# Altium PCB YarnControl_Driver_v1.3.PcbDoc
Units mm, origin at the board's own origin, x right, y up, seen from the top; angles counter-clockwise.
Board outline 80 x 60 mm, 2 copper layers (Top Layer, Bottom Layer); 141 components, 102 nets, 471 pads, 205 vias.
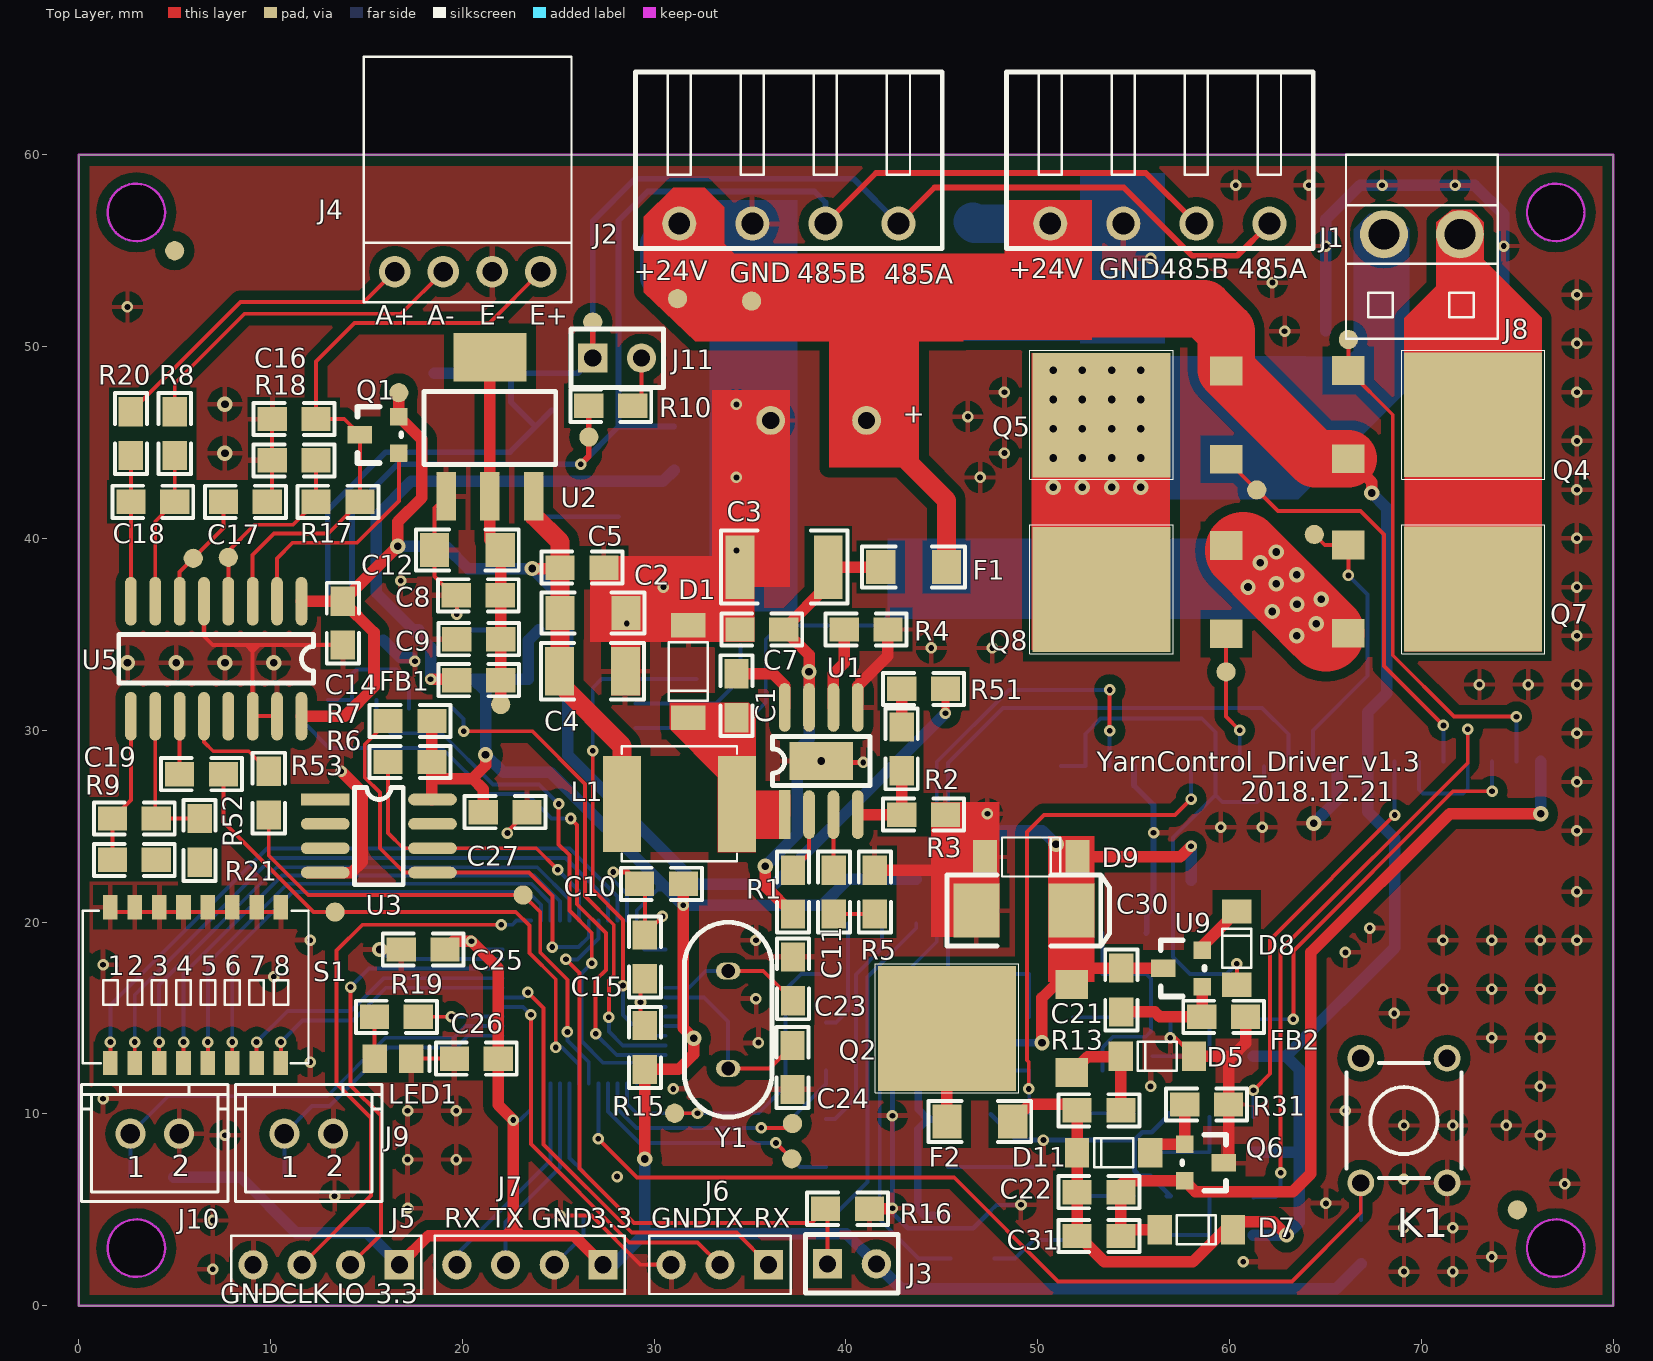
[diagram p0: Top Layer view]
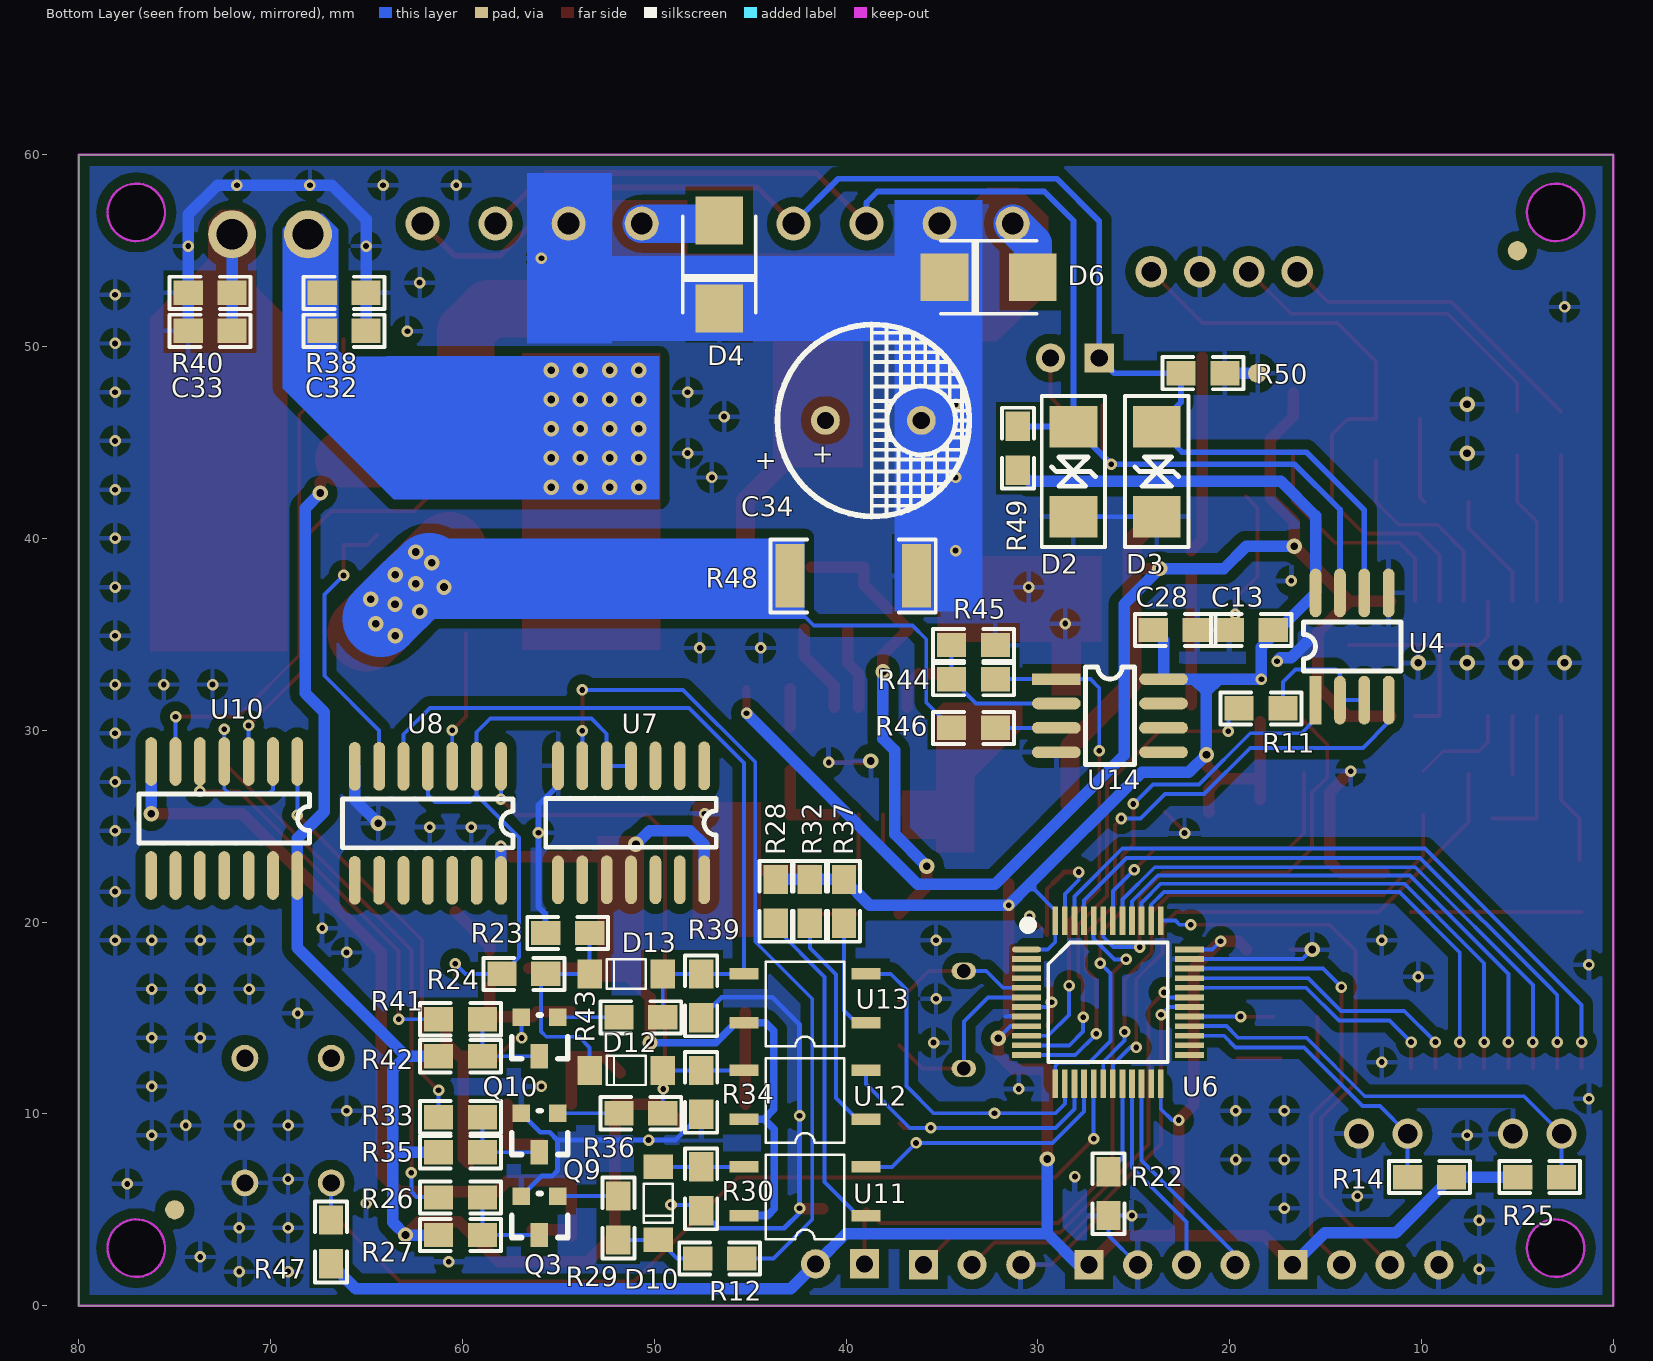
[diagram p1: Bottom Layer view, seen from below]
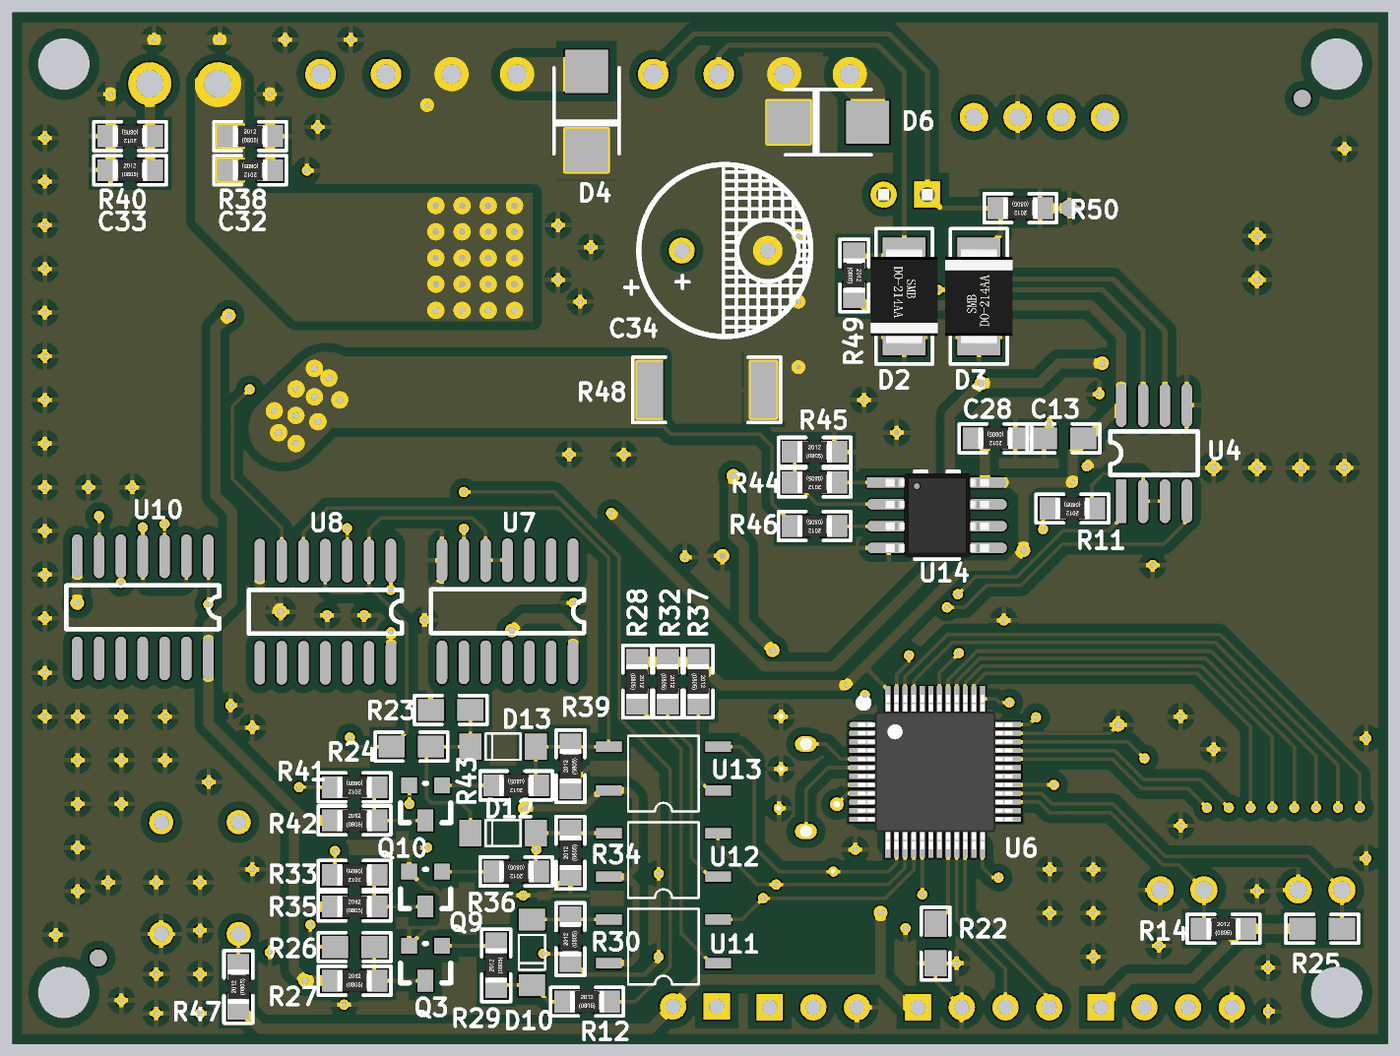
[diagram p2: 3D render of the assembled board from below, using the file's embedded part models]

## Layer stack, top to bottom
Top Layer: signal copper 0.0356
Dielectric: dielectric 0.32, FR-4, Dk 4.8
Bottom Layer: signal copper 0.0356

## Board outline
0,0 80,0 80,60 0,60
cut-out: 3,55.5 cw(c3,57) 1.5,57 cw(c3,57) 3,58.5 cw(c3,57) 4.5,57 cw(c3,57)
cut-out: 75.5,57 ccw(c77,57) 77,55.5 ccw(c77,57) 78.5,57 ccw(c77,57) 77,58.5 ccw(c77,57)
cut-out: 75.5,3 ccw(c77,3) 77,1.5 ccw(c77,3) 78.5,3 ccw(c77,3) 77,4.5 ccw(c77,3)
cut-out: 3,1.5 cw(c3,3) 1.5,3 cw(c3,3) 3,4.5 cw(c3,3) 4.5,3 cw(c3,3)

## Design rules (kind name [scope] priority, off if disabled: settings)
Clearance LQFP_48 [(HasFootprint('LQFP_48'))] p1: gap=0.178
Clearance poly [inpoly] p2: gap=0.508
Clearance [All] p3: gap=0.203
Height [All] p1: minheight=0 maxheight=50 prefheight=12.7
HoleSize [All] p1: absolutevalues=TRUE maxlimit=4 minlimit=0.025 maxpercent=80.000 minpercent=20.000
MinimumSolderMaskSliver [All] p1: minsoldermaskwidth=0
PolygonConnect [All] p1: connectstyle=Relief reliefconductorwidth=0.254 reliefentries=4 polygonreliefangle="90 Angle"
RoutingVias [All] p1: holewidth=0.711 width=1.27 viastyle="Through Hole" minholewidth=0.3 minwidth=0.6 maxholewidth=0.711 maxwidth=1.27
SilkToSilkClearance [All] p1: silktosilkclearance=0
SilkscreenOverComponentPads [All] p1: minsilkscreentomaskgap=0
SolderMaskExpansion [All] p1: expansion=0.102
Width [All] p1: maxlimit=5 minlimit=0.203 preferedwidth=0.203
23 further rules are at their usual default settings.

## Classes and differential pairs
component class YarnControl_motor_v1.3: C21 C22 C30 C31 C32 C33 C34 D4 D5 D6 D7 D8 D9 D10 D11 D12 D13 F2 FB2 J8 Q2 Q3 Q4 Q5 Q6 Q7 Q8 Q9 Q10 R12 R13 R23 R24 R26 R27 R28 R29 R30 R31 R32 R33 R34 R35 R36 R37 R38 R39 R40 R41 R42 R43 R44 R45 R46 R48 U7 U8 U9 U10 U11 U12 U13 U14
component class YarnControl_Driver_v1.3: C1 C2 C3 C4 C5 C7 C8 C9 C10 C11 C12 C13 C14 C15 C16 C17 C18 C19 C23 C24 C25 C26 C27 C28 D1 D2 D3 F1 FB1 J1 J2 J3 J4 J5 J6 J7 J9 J10 J11 K1 L1 LED1 Q1 R1 R2 R3 R4 R5 R6 R7 R8 R9 R10 R11 R14 R15 R16 R17 R18 R19 R20 R21 R22 R25 R47 R49 R50 R51 R52 R53 R? S1 U1 U2 U3 U4 U5 U6 Y1

## Components (designator, comment, footprint, x,y, rotation, side; value= is the part's Value field where it differs from the comment)
C1 "0.1uF" 0805#1 34.29,32.944 r270 top
C2 "22uF" 1206 28.524,36.119 r180 top
C3 "47uF" 1812 36.779,38.506 r180 top
C4 "47uF" 1210 28.499,33.071 r180 top
C5 "0.1uF" 0805#1 27.381,38.481 r180 top
C7 "0.1uF" 0805#1 36.754,35.255 r180 top
C8 "10uF" 0805#1 19.685,37.033 r0 top
C9 "0.1uF" 0805#1 19.71,34.747 r0 top
C10 "0.1uF" 0805#2 30.378,21.996 r180 top
C11 "150pF" 0805#1 39.37,22.708 r270 top
C12 "22uF" 1206 21.971,39.395 r180 top
C13 "0.1uF" 0805#1 20.015,35.23 r180 bottom
C14 "1uF" 0805#1 13.767,34.442 r90 top
C15 "0.1uF" 0805#1 29.515,19.329 r270 top
C16 "1uF" 0805#1 10.084,46.228 r0 top
C17 "1uF" 0805#1 7.544,41.91 r0 top
C18 "0.1uF" 0805#1 5.004,41.91 r180 top
C19 "0.1uF" 0805#1 1.753,25.4 r0 top
C21 "10uF" 0805#1 54.356,17.602 r270 top
C22 "10nF" 0805#1 52.045,5.918 r0 top
C23 "22pF" 0805#2 37.236,17.043 r270 top
C24 "22pF" 0805#2 37.211,12.421 r90 top
C25 "0.1uF" 0805#2 17.958,18.567 r0 top
C26 "0.1uF" 0805#2 20.726,12.878 r0 top
C27 "0.1uF" 0805#2 22.225,25.73 r180 top
C28 "0.1uF" 0805#2 22.835,35.23 r0 bottom
C30 "100uF" CA6032-C 49.276,20.599 r0 top
C31 "22uF" 0805#2 53.188,3.632 r180 top
C32 "10nF" 0805#2 66.167,50.825 r0 bottom
C33 "10nF" 0805#2 73.152,50.825 r180 bottom
C34 "1000uF/35V" CAP-5MM 41.072,46.152 r180 bottom
D1 "1N5819" Diode_TP2 31.775,35.484 r270 top
D2 "SMBJ6.5CA" SMBJ_DO-214 28.143,43.485 r270 bottom
D3 "SMBJ6.5CA" SMBJ_DO-214 23.8,43.485 r90 bottom
D4 "SMCJ24A" DO-214AA/SMB 46.609,54.28 r270 bottom
D5 "ZMM6V2" DIDODE_LL-34 56.236,13.005 r180 top
D6 "SMCJ24A" DO-214AA/SMB 32.563,53.619 r0 bottom
D7 "ZMM6V2" DIDODE_LL-34 58.268,3.962 r0 top
D8 "1N4148" DIDODE_LL-34 60.376,18.644 r90 top
D9 "SMAJ5.0A" Diode_TP2 47.244,23.393 r0 top
D10 "1N4148" DIDODE_LL-34 49.784,5.334 r270 bottom
D11 "ZMM6V2" DIDODE_LL-34 53.95,7.976 r180 top
D12 "1N4148" DIDODE_LL-34 51.46,12.268 r0 bottom
D13 "1N4148" DIDODE_LL-34 51.46,17.297 r0 bottom
F1 "FUSE" 1206 45.237,38.506 r180 top
F2 "FUSE" 1206 45.263,9.601 r0 top
FB1 "FERRITE" 0805#1 21.996,32.614 r180 top
FB2 "FERRITE" 0805#2 59.69,15.062 r0 top
J1 "SH-4" J381-4-90 62.078,56.413 r0 top
J2 "SH-4" J381-4-90 42.735,56.413 r0 top
J3 "Jumper" J254-2 39.04,2.184 r0 top
J4 "SH-4" KF2510-4 24.088,53.913 r0 top
J5 "SH-4" J254-4 16.713,2.134 r180 top
J6 "SH-3" J2.54-3 33.426,2.134 r180 top
J7 "SH-4" J254-4 27.33,2.134 r180 top
J8 "SH-2" CH3.96-2P 70.028,55.855 r0 top
J9 "SWITCH1" XH2.54-2T 10.719,8.966 r0 top
J10 "SWITCH2" XH2.54-2T 2.692,8.966 r0 top
J11 "Jumper" J254-2 26.797,49.403 r0 top
K1 "BUTTON_4" Button1 69.088,9.652 r90 top
L1 "4.7uH" Inductance6*6 31.318,26.162 r180 top
LED1 "GREEN" LED 16.383,12.878 r0 top
Q1 "S8550" 901X_SOT-23 14.656,45.415 r90 top
Q2 "2SD1760" TO-252-2L 48.514,14.453 r90 top
Q3 "MMBT3904" SOT-23 55.982,3.683 r0 bottom
Q4 "NCE40P70K" TO-252 72.695,46.457 r270 top
Q5 "NCE40P70K" TO-252 53.315,46.431 r90 top
Q6 "MMBT2907A" 901X_SOT-23 59.69,7.442 r270 top
Q7 "NCE6075" TO-252 72.695,37.363 r270 top
Q8 "NCE6075" TO-252 53.315,37.338 r90 top
Q9 "MMBT3904" SOT-23 55.982,8.001 r0 bottom
Q10 "MMBT3904" SOT-23 55.982,13.005 r0 bottom
R1 "100K" 0805#1 37.236,22.708 r270 top
R2 "200K" 0805#1 42.901,30.175 r270 top
R3 "40.2K" 0805#1 45.187,25.603 r180 top
R4 "100K" 0805#1 42.189,35.255 r180 top
R5 "100K" 0805#1 41.504,22.708 r270 top
R6 "10K" 0805#1 16.129,28.346 r0 top
R7 "10K" 0805#1 16.129,30.48 r0 top
R8 "1K" 0805#2 5.004,45.466 r90 top
R9 "1K" 0805#2 2.896,23.241 r0 top
R10 "120R" 0805#1 26.594,46.914 r0 top
R11 "1K" 0805#2 18.364,31.14 r0 bottom
R12 "4.7K" 0805#2 46.584,2.464 r180 bottom
R13 "5.6K" 0805#2 53.188,10.185 r0 top
R14 "10K" 0805#2 9.576,6.706 r180 bottom
R15 "10K" 0805#1 29.515,14.605 r270 top
R16 "10K" 0805#1 38.938,5.055 r0 top
R17 "20K" 0805#1 12.37,41.91 r0 top
R18 "8.2K" 0805#1 12.37,44.069 r180 top
R19 "1K" 0805#1 15.418,15.062 r0 top
R20 "1K" 0805#1 2.718,44.323 r90 top
R21 "1K" 0805#1 6.299,25.4 r270 top
R22 "10K" 0805#1 26.314,4.699 r90 bottom
R23 "10K" 0805#1 55.651,19.431 r180 bottom
R24 "10K" 0805#1 55.651,17.297 r0 bottom
R25 "10K" 0805#1 4.978,6.706 r180 bottom
R26 "10K" 0805#1 58.953,5.639 r0 bottom
R27 "10K" 0805#2 60.096,3.683 r180 bottom
R28 "510R" 0805#2 43.663,21.082 r270 bottom
R29 "10K" 0805#2 51.867,4.572 r90 bottom
R30 "510R" 0805#2 47.549,6.096 r90 bottom
R31 "5.6K" 0805#2 58.801,10.49 r180 top
R32 "510R" 0805#2 41.885,21.082 r270 bottom
R33 "10K" 0805#2 60.096,9.83 r0 bottom
R34 "4.7K" 0805#2 47.549,11.125 r90 bottom
R35 "10K" 0805#2 60.096,8.001 r180 bottom
R36 "10K" 0805#2 50.698,10.033 r0 bottom
R37 "510R" 0805#2 40.107,21.082 r270 bottom
R38 "1M" 0805#2 66.167,52.807 r180 bottom
R39 "4.7K" 0805#2 47.549,16.154 r90 bottom
R40 "1M" 0805#2 73.152,52.807 r0 bottom
R41 "10K" 0805#2 60.096,14.935 r0 bottom
R42 "10K" 0805#2 60.096,13.005 r180 bottom
R43 "10K" 0805#2 50.698,15.037 r0 bottom
R44 "10K" 0805#2 33.35,32.664 r0 bottom
R45 "1K" 0805#2 33.35,34.442 r180 bottom
R46 "1K" 0805#2 33.35,30.124 r0 bottom
R47 "10K" 0805#2 66.853,3.327 r90 bottom
R48 "R100" 2512 39.624,38.049 r0 bottom
R49 "360R" 0805#2 31.039,44.704 r270 bottom
R50 "360R" 0805#2 21.387,48.616 r0 bottom
R51 "10K" 0805#2 44.044,32.156 r180 top
R52 "1K" 0805#1 7.544,27.711 r180 top
R53 "1K" 0805#1 9.906,25.578 r90 top
S1 "SW-CH8" SWITCH_8 6.096,16.713 r0 top
U1 "MP1584" MP1584 38.71,28.397 r90 top
U2 "AMS1117" TO-223 21.438,45.822 r0 top
U3 "SMEC98SP" SO-8#1 15.646,24.486 r0 top
U4 "SP3485" SO-8#1 13.614,34.366 r90 bottom
U5 "HX711" SO-16 11.608,36.728 r270 top
U6 "STM32F103C8T6" LQFP_48 26.34,15.824 r180 bottom
U7 "74VHC00" SO-14 47.396,28.143 r270 bottom
U8 "74VHC08" SO-14 57.988,28.118 r270 bottom
U9 "MAX809" SOT-23 56.54,17.602 r90 top
U10 "74VHC00" SO-14 68.605,28.372 r270 bottom
U11 "EL357N" EL357N 42.139,5.969 r0 bottom
U12 "EL357N" EL357N 42.139,10.998 r0 bottom
U13 "EL357N" EL357N 42.139,16.027 r0 bottom
U14 "LM358" SO-8#2 29.032,32.664 r180 bottom
Y1 "8M" XTAL 33.858,12.37 r90 top

## Footprints (in the part's own frame and the unit in brackets; to place one, negate y for a bottom-side part, rotate by r counter-clockwise, add the part's x,y. Pads: shape width x height; smd on the part's side, far side on the other; paste and mask are expansions set on the pad)
0805#1 [mil]
  rect 60x50 smd: 1(0,0) 2(90,0)
  silkscreen extent -38,-33 128,33
0805#2 [mil]
  rect 60x50 smd: 1(-45,0) 2(45,0)
  silkscreen extent -83,-33 83,33, body extent -39,-25 39,24, height 18
901X_SOT-23 [mil]
  rect 36x50 smd: 1(0,0)
  rect 36x36 smd: 2(-38,-80) 3(37,-80)
  silkscreen extent -58,-85 57,5
1206 [mil]
  rect 60x70 smd: 1(0,0) 2(135,0)
  silkscreen extent -38,-42 173,42
1210 [mil]
  rect 60x100 smd: 1(0,0) 2(135,0)
  silkscreen extent -38,-58 173,58
1812 [mm]
  rect 1.5x3.3 smd: 1(-2.3,0) 2(2.3,0)
  silkscreen extent -3.3,-1.91 3.3,1.91
2512 [mm]
  rect 1.5x3.3 smd: 1(-3.3,0) 2(3.3,0)
  silkscreen extent -4.3,-1.91 4.3,1.91
Button1 [mm]
  round 1.4 hole 0.9: 1(-3.25,2.25) 2(3.25,2.25) 3(-3.25,-2.25) 4(3.25,-2.25)
  silkscreen extent -3,-3 3,3, body extent -3.94,-3 4.03,3, height 4.9
CA6032-C [mm]
  rect 2.4x2.8 smd: 1(2.48,0) 2(-2.48,0)
  silkscreen extent -4.01,-1.85 4.47,1.85, body extent -3.05,-1.68 3.05,1.67, height 2.7
CAP-5MM [mm]
  round 1.5 hole 0.9: 1(0,0) 2(5,0)
  silkscreen extent -2.5,-5 7.5,5
CH3.96-2P [mm]
  round 2.5 hole 1.6: 1(-1.98,0) 2(1.98,0)
  silkscreen extent -3.96,-5.45 3.96,4.15
DIDODE_LL-34 [mil]
  rect 50x60 smd: 1(-75,0) 2(75,0)
  silkscreen extent -40,-30 40,30
Diode_TP2 [mil]
  rect 50x70 smd: 1(0,0) 2(190,0)
  silkscreen extent 35,-40 155,40
DO-214AA/SMB [mm]
  rect 2.5x2.5 smd: 1(-2.3,0) 2(2.3,0)
  silkscreen extent -2.5,-1.9 2.5,1.9
EL357N [mm]
  rect 1.5x0.6 smd: 1(-3.175,1.27) 2(-3.175,-1.27) 3(3.175,-1.27) 4(3.175,1.27)
  silkscreen extent -2.05,-1.9 2.05,2.5
Inductance6*6 [mm]
  rect 2x5 smd: 1(-3,0) 2(3,0)
  silkscreen extent -3,-3 3,3
J2.54-3 [mil]
  rect 60x60 hole 35: 1(-100,0)
  round 60 hole 35: 2(0,0) 3(100,0)
  silkscreen extent -145,-60 145,60
J254-2 [mil]
  rect 60x60 hole 35: 1(0,0)
  round 60 hole 35: 2(100,0)
  silkscreen extent -45,-60 145,60
J254-4 [mil]
  rect 60x60 hole 35: 1(0,0)
  round 60 hole 35: 2(100,0) 3(200,0) 4(300,0)
  silkscreen extent -45,-60 345,60
J381-4-90 [mil]
  round 70 hole 45: 1(0,0) 2(-150,0) 3(-300,0) 4(-450,0)
  silkscreen extent -540,-51 90,311
KF2510-4 [mil]
  round 65 hole 40: 1(0,0) 2(-100,0) 3(-200,0) 4(-300,0)
  silkscreen extent -363,-63 63,441
LED [mm]
  rect 1.3x1.5 smd: 1(-0.95,0) 2(0.95,0)
  silkscreen extent 1.9,-0.65 1.9,0.65
LQFP_48 [mm]
  oval 1.5x0.3 smd: 1(-4.25,2.75)
  rect 1.5x0.3 smd: 2(-4.25,2.25) 3(-4.25,1.75) 4(-4.25,1.25) 5(-4.25,0.75) 6(-4.25,0.25) 7(-4.25,-0.25) 8(-4.25,-0.75) 9(-4.25,-1.25) 10(-4.25,-1.75) 11(-4.25,-2.25) 12(-4.25,-2.75) 25(4.25,-2.75) 26(4.25,-2.25) 27(4.25,-1.75) 28(4.25,-1.25) 29(4.25,-0.75) 30(4.25,-0.25) 31(4.25,0.25) 32(4.25,0.75) 33(4.25,1.25) 34(4.25,1.75) 35(4.25,2.25) 36(4.25,2.75)
  rect 0.3x1.5 smd: 13(-2.75,-4.25) 14(-2.25,-4.25) 15(-1.75,-4.25) 16(-1.25,-4.25) 17(-0.75,-4.25) 18(-0.25,-4.25) 19(0.25,-4.25) 20(0.75,-4.25) 21(1.25,-4.25) 22(1.75,-4.25) 23(2.25,-4.25) 24(2.75,-4.25) 37(2.75,4.25) 38(2.25,4.25) 39(1.75,4.25) 40(1.25,4.25) 41(0.75,4.25) 42(0.25,4.25) 43(-0.25,4.25) 44(-0.75,4.25) 45(-1.25,4.25) 46(-1.75,4.25) 47(-2.25,4.25) 48(-2.75,4.25)
  silkscreen extent -4.33,-3.11 3.11,4.18, body extent -4.5,-4.5 4.5,4.5, height 1.6
MP1584 [mil]
  rect 78.74x129.92 smd: 0(0,0)
  rect 100x24 smd: 1(-110,75)
  oval 100x24 smd: 2(-110,25) 3(-110,-25) 4(-110,-75) 5(110,-75) 6(110,-25) 7(110,25) 8(110,75)
  silkscreen extent -50,-100 50,100
SMBJ_DO-214 [mm]
  rect 2.16x2.5 smd: 1(-2.35,0) 2(2.35,0)
  silkscreen extent -3.94,-1.65 3.94,1.65, body extent -2.8,-1.95 2.8,1.95, height 2.5
SO-8#1 [mil]
  rect 100x24 smd: 1(-110,75)
  oval 100x24 smd: 2(-110,25) 3(-110,-25) 4(-110,-75) 5(110,-75) 6(110,-25) 7(110,25) 8(110,75)
  silkscreen extent -50,-100 50,100
SO-8#2 [mil]
  rect 100x24 smd: 1(0,0)
  oval 100x24 smd: 2(0,-50) 3(0,-100) 4(0,-150) 5(220,-150) 6(220,-100) 7(220,-50) 8(220,0)
  silkscreen extent 60,-175 160,25, body extent -7,-172 229,21, height 67
SO-14 [mil]
  oval 100x24 smd: 1(0,0) 2(0,-50) 3(0,-100) 4(0,-150) 5(0,-200) 6(0,-250) 7(0,-300) 8(234,-300) 9(234,-250) 10(234,-200) 11(234,-150) 12(234,-100) 13(234,-50) 14(234,0)
  silkscreen extent 67,-325 167,25
SO-16 [mil]
  oval 100x24 smd: 1(0,0) 2(0,-50) 3(0,-100) 4(0,-150) 5(0,-200) 6(0,-250) 7(0,-300) 8(0,-350) 9(236,-350) 10(236,-300) 11(236,-250) 12(236,-200) 13(236,-150) 14(236,-100) 15(236,-50) 16(236,0)
  silkscreen extent 68,-375 168,25
SOT-23 [mil]
  rect 36x36 smd: 1(-38,-80) 2(37,-80)
  rect 36x50 smd: 3(0,0)
  silkscreen extent -58,-85 57,5
SWITCH_8 [mm]
  rect 0.76x1.27 smd: 1(-4.445,-4.06) 2(-3.175,-4.06) 3(-1.905,-4.06) 4(-0.635,-4.06) 5(0.635,-4.06) 6(1.905,-4.06) 7(3.175,-4.06) 8(4.445,-4.06) 9(4.445,4.06) 10(3.175,4.06) 11(1.905,4.06) 12(0.635,4.06) 13(-0.635,4.06) 14(-1.905,4.06) 15(-3.175,4.06) 16(-4.445,4.06)
  silkscreen extent -5.88,-4.06 5.88,3.88
TO-223 [mil]
  rect 150x100 smd: 0(0,142.5)
  rect 40x100 smd: 1(-90,-142.5) 2(0,-142.5) 3(90,-142.5)
  silkscreen extent -135,-78 135,72
TO-252 [mm]
  rect 6.5x7.2 smd: 1(0,0)
  rect 1.5x1.7 smd: 2(-2.3,-6.5) 3(2.3,-6.5)
  silkscreen extent -3.35,-3.73 3.38,3.73
TO-252-2L [mm]
  rect 1.5x1.7 smd: 1(-2.3,-3.25) 3(2.3,-3.25)
  rect 6.5x7.2 smd: 2(0,3.25)
  silkscreen extent -3.35,-0.48 3.38,6.98
XH2.54-2T [mil]
  round 62 hole 40: 1(0,0) 2(100,0)
  silkscreen extent -100,-139 200,101
XTAL [mil]
  oval 35x50 hole 28: 1(0,0) 2(200,0)
  silkscreen extent -100,-90 300,90, body extent -121,-93 319,91, height 143

## Part data
C1 C2 C3 C7 C11 C12 C14 C16 C17 C18 C19 C21 C22 C23 C24 C31 C32 C33: library part CAP, "电容"
C4 C5 C8 C9: library part Cap0805
C10 C13 C15 C25 C26 C27 C28: library part Cap, "Capacitor"
C30: library part CapAEC*4
C34: library part "Cap Pol1", "Polarized Capacitor (Radial)"
D1: library part Diode, "二极管"
D2 D3 D4 D6 D9: library part TVS
D5 D7 D11: library part "D Zener", "Zener Diode"
D8 D10 D12 D13: library part Diode, "Default Diode"
F1 F2: "保险丝"
J9 J10: library part SH-2
L1: library part Inductor, "电感"
LED1: library part LED2, "Typical RED, GREEN, YELLOW, AMBER GaAs LED"
Q1 Q6: library part PNP
Q3 Q9 Q10: library part S8050
Q4 Q5: library part MOSFET-P, "P-Channel MOSFET"
Q7 Q8: library part MOSFET-N, "N-Channel MOSFET"
R1 R2 R3 R4 R5 R8 R9 R12 R13 R16 R17 R18 R19 R20 R21 R23 R24 R26 R27 R28 R29 R30 R31 R32 R33 R34 R35 R36 R37 R38 R39 R40 R41 R42 R43 R44 R45 R46 R48 R51 R52 R53: library part RES, "电阻"
R6 R7 R10 R11 R14 R15 R22 R25 R47 R49 R50: library part Res2, "Resistor"
S1: "拨码开关CH8"
U4: "485"
U8: library part 74HC08
U11 U12 U13: library part TLP521
Y1: library part XTAL, "Crystal Oscillator"

## Free pads (board coordinates)
  round 1 smd: 0(5,55) 0(23.165,21.412) 0(75,5) 1(13.36,20.523) 2(16.688,47.6) 3(21.996,31.344) 5(31.217,52.502) 6(35.077,52.375) 7(37.172,7.659) 8(37.211,9.5) 9(31.064,10.033) 10(66.192,50.368) 11(61.415,42.531) 12(59.815,33.045) 13(64.414,40.208) 14(26.594,45.288) 15(26.797,51.283) 16(7.798,39.014) 17(5.969,38.964)
  round 1 smd far side: 0(5,55) 0(75,5) 4(18.542,48.616)

## Via types
v1: diameter 0.6, hole 0.3, Top Layer to Bottom Layer, 154 vias
v2: diameter 0.8, hole 0.4, Top Layer to Bottom Layer, 51 vias

## Nets (pads, with @x,y where several pads share a name; then routed paths per layer and width w, separated by ;. In a path a pad name is that pad's centre, name@x,y a point inside that pad or via, vN(x,y) a via of type N, cw(c..) or ccw(c..) an arc to the next point about the centre after c; other vN are vias at no path point)
485_DE: R11.2 U6.11 | length 25.8
  Top Layer w0.203: v1(20.066,29.947) 23.647,29.947 26.391,27.203 26.391,21.361 27.889,19.863 27.889,17.221 27.635,16.967 v1(27.635,15.037)
  Bottom Layer w0.203: R11.2 20.066,30.582 v1(20.066,29.947) ; v1(27.635,15.037) 27.635,14.3 28.361,13.574 U6.11
485_RX: U4.1 U6.13 | length 30
  Top Layer w0.203: v1(25.019,26.162) 25.019,24.054 25.578,23.495 25.578,20.599 26.746,19.431 v1(26.746,17.856)
  Bottom Layer w0.203: U4.1 15.519,30.582 16.256,29.845 18.923,29.845 21.59,27.178 24.003,27.178 v1(25.019,26.162) ; v1(26.746,17.856) 26.213,17.323 26.213,13.792 27.337,12.668 28.912,12.668 29.09,12.49 U6.13
485_TX: U4.4 U6.12 | length 33.5
  Top Layer w0.203: v1(25.654,25.4) 25.984,25.07 25.984,20.93 27.483,19.431 27.483,17.501 26.949,16.967 v1(26.949,14.173)
  Bottom Layer w0.203: U4.4 11.709,30.429 13.056,29.083 18.923,29.083 21.336,26.67 23.368,26.67 24.638,25.4 v1(25.654,25.4) ; v1(26.949,14.173) 28.048,13.074 U6.12
+3.3V: C10.1 C13.2 C25.2 C26.2 C27.2 C28.2 FB1.2 J3.2 J5.1 J7.1 R6.2 R7.2 R14.2 R15.2 R25.1 R28.1 R32.1 R37.1 R47.1 R49.2 U3.8 U4.8 U6.1 U6.9 U6.24 U6.36 U6.48 U14.8 | length 196.2
  Top Layer w0.203: C27.2 C27.2@21.26,25.73
  Top Layer w0.6: J5.1 18.237,3.658 22.276,3.658 ; v1(18.339,32.664) FB1.2@19.66,32.664 ; U3.8@18.415,26.391 18.415,27.432 ; R7.2@18.415,29.947 18.415,29.616 ; R7.2@18.415,30.455 18.415,29.616 ; C25.2 19.533,18.999 v1(20.472,18.999) 21.869,17.602 21.869,10.465 v1(22.657,9.677) 22.657,4.039 ; C27.2@21.057,25.756 C27.2 21.082,26.924 20.523,27.483 ; v2(21.209,28.727) 21.209,28.169 20.523,27.483 ; J7.1 25.806,3.658 23.038,3.658 ; v2(29.515,7.645) R15.2 31.267,12.319 32.055,13.106 v2(32.055,13.945) 31.521,14.478 v1(31.521,20.879) C10.1 ; 18.415,27.432 R6.2 18.415,29.616 ; 18.415,27.432 18.466,27.483 20.523,27.483 ; 22.276,3.658 23.038,3.658 ; 22.276,3.658 22.657,4.039 ; 22.657,4.039 23.038,3.658
  Bottom Layer w0.203: v1(20.472,18.999) 20.904,18.567 U6.36@22.083,18.567 ; 23.012,9.677 23.59,10.255 U6.24 ; 30.175,22.186 30.175,21.692 ; 30.455,21.971 30.442,21.958 30.175,21.692 ; U6.9 31.425,14.574 v2(32.055,13.945) ; U6.1 29.483,18.574 29.09,18.967 U6.48 29.09,20.606 30.175,21.692 ; 30.658,21.692 30.175,21.692
  Bottom Layer w0.6: R25.1@4.953,6.706 R25.1 R14.2@8.357,6.706 ; R14.2 11.328,3.81 15.037,3.81 J5.1 ; C13.2 C13.2@17.45,35.23 ; C28.2 23.444,34.696 U14.8 21.844,32.664 ; J7.1 27.889,2.134 29.515,3.759 ; v2(29.515,7.645) 29.515,3.759 ; R49.2 30.455,42.977 17.323,42.977 15.519,41.173 U4.8 C13.2@17.45,35.23 ; R28.1 R32.1 R37.1 38.76,20.879 v1(31.521,20.879) 30.442,21.958 24.587,27.813 22.123,27.813 v2(21.209,28.727) 21.209,32.029 ; R47.1 65.557,0.889 42.875,0.889 J3.2 40.005,3.759 29.515,3.759 ; C13.2@17.45,35.23 18.339,34.341 v1(18.339,32.664) 20.574,32.664 ; 20.574,32.664 21.209,32.029 ; 20.574,32.664 21.209,32.664 ; 21.209,32.029 21.844,32.664 ; 21.209,32.029 21.209,32.664 ; 21.209,32.664 21.844,32.664
+5V: C2.2 C4.2 C5.2 C14.2 L1.2 pad.2 Q1.3 R51.1 U2.3 U5.1 U5.16 | length 88.9
  Top Layer w0.4: C5.2@24.765,38.481 C5.2 ; L1.2 L1.2@28.321,26.165 ; v1(45.187,30.886) R51.1
  Top Layer w0.6: U5.16 13.868,30.734 15.392,32.258 15.392,35.103 C14.2 ; U5.1 C14.2 ; pad.2 Q1.3 17.882,45.161 17.882,42.113 16.637,40.869 v2(16.637,39.599) C14.2 ; v2(23.647,38.43) 25.044,38.43 C5.2
  Top Layer w1: U2.3@23.724,41.186 25.095,39.814 C5.2 25.095,32.408 28.318,29.185 L1.2
  Bottom Layer w0.6: v2(16.637,39.599) 19.126,39.599 20.295,38.43 v2(23.647,38.43) 25.502,36.576 25.502,28.702 32.233,21.971 36.271,21.971 v1(45.187,30.886)
+24V: C22.1 C31.2 C34.1 D4.1 D6.1 D7.2 D11.2 F1.1 F2.2 J1.4 J2.4 pad.5 pad.6 Q4.3 Q5.3 R13.1 R27.1 R35.1 R42.1 U10.14 | length 114.5
  Top Layer w0.6: F2.2 49.581,10.49 52.045,10.49 R13.1 D11.2 C22.1 52.045,3.708 52.083,3.67 53.467,2.286 58.09,2.286 59.969,4.166 60.173,4.369 62.281,4.369 v2(62.967,3.683) ; Q4.3 67.412,42.94 v2(67.412,42.367)
  Top Layer w1: C34.1 45.237,41.986 F1.1
  Top Layer w3: 47.015,51.968 58.649,51.968 59.815,50.802 59.815,48.796 59.847,48.764 64.454,44.157 Q4.3
  Bottom Layer w0.6: R27.1 v2(62.967,3.683) 63.627,4.343 63.627,7.976 ; R35.1 63.602,8.001 63.627,7.976 ; R42.1 62.941,13.005 ; v2(67.412,42.367) 68.199,41.58 68.199,31.928 67.208,30.937 67.208,25.756 68.605,24.359 U10.14 68.605,18.669 62.941,13.005 ; 62.941,13.005 63.627,12.319 63.627,7.976
  Bottom Layer w2: D6.1 30.263,55.371 J2.4 ; D4.1@46.609,56.515 46.711,56.413 J1.4
BOOT0: J3.1 R16.1 U6.44 | length 31.5
  Top Layer w0.203: v1(25.4,18.059) 26.111,17.348 26.111,7.163 28.956,4.318 38.202,4.318 R16.1 39.04,4.953 J3.1
  Bottom Layer w0.203: v1(25.4,18.059) 26.01,18.059 27.09,19.14 U6.44
BOOT1: R22.2 U6.20 | length 4.9
  Bottom Layer w0.203: U6.20 25.59,7.71 R22.2
BT_RXD: J7.4 U6.22 | length 11.5
  Bottom Layer w0.203: J7.4 19.71,2.692 24.59,7.572 U6.22
BT_TXD: J7.3 U6.21 | length 10.6
  Bottom Layer w0.203: J7.3 22.25,4.369 25.09,7.208 U6.21
CLEAR: K1.1 R47.2 U6.17 | length 50.6
  Top Layer w0.203: v1(27.09,8.699) 29.108,6.68 45.644,6.68 51.054,1.27 63.246,1.27 66.838,4.862 K1.1
  Bottom Layer w0.203: v1(27.09,8.699) U6.17 ; R47.2 K1.1@66.853,6.387
ENA: pad.7 U6.16 U11.2 | length 15.2
  Top Layer w0.203: v1(36.347,8.484) pad.7
  Bottom Layer w0.203: U6.16 27.59,10.129 29.235,8.484 v1(36.347,8.484) 37.592,7.239 U11.2
GND: C2.1 C3.2 C4.1 C5.1 C7.2 C8.1 C9.1 C10.2 C12.2 C13.1 C14.1 C15.1 C16.1 C17.2 C23.1 C24.1 C25.1 C26.1 C27.1 C28.1 C30.2 C32.1 C33.1 C34.2 D1.1 D2.2 D3.1 D4.2 D5.1 D6.2 D9.1 FB2.2 J1.3 J2.3 J4.2 J5.4 J6.3 J7.2 J9.2 J10.2 K1.3 LED1.2 pad.4 Q3.2 Q6.1 Q9.2 Q10.2 R3.1 R4.1 R5.1 R16.2 R18.2 R22.1 R23.1 R30.1 R31.1 R34.1 R38.2 R39.1 R40.2 R45.2 R48.1 R50.1 S1.9 S1.10 S1.11 S1.12 S1.13 S1.14 S1.15 S1.16 U1.0 U1.5 U2.1 U3.4 U4.5 U5.5 U5.14 U5.15 U6.8 U6.23 U6.35 U6.47 U7.7 U8.7 U14.4 | length 201.4
  Top Layer w0.203: S1.16@1.651,20.519 2.921,20.519 4.191,20.519 5.461,20.519 6.731,20.519 8.001,20.519 9.271,20.519 S1.9@10.541,20.519 ; U5.5 6.528,34.9 6.985,34.442 8.738,34.442 ; C17.2 10.084,42.164 R18.2 C16.1 ; U5.15 U5.14 9.068,34.112 ; C14.1 9.398,34.442 ; v2(15.697,18.567) C25.1 ; LED1.2 C26.1 ; U2.1 18.542,41.593 C12.2 18.542,38.024 19.71,36.855 v1(19.71,36.043) ; v1(22.352,24.638) 22.352,24.714 C27.1 ; J7.2@24.79,1.549 J7.2 ; v1(25.095,4.699) 26.73,4.699 29.296,2.134 J6.3 J6.3@30.886,1.549 ; C5.1@27.851,38.951 28.524,38.278 C2.1 28.524,33.401 C4.1@28.499,33.376 ; C10.2 29.515,21.717 C15.1@29.515,19.38 ; C15.1 C15.1@29.515,19.38 ; v1(30.429,20.295) C15.1@29.515,19.38 ; C7.2@34.265,35.255 C7.2 C3.2@34.468,37.414 ; v1(56.909,13.957) 57.188,13.957 D5.1 ; 8.738,34.442 9.068,34.442 ; 8.738,34.442 9.068,34.112 ; 9.068,34.112 9.398,34.442 ; 9.068,34.112 9.068,34.442 ; 9.068,34.442 9.398,34.442
  Top Layer w0.254: v1(27.864,22.606) 28.626,22.606 C10.2 ; U1.0@38.786,28.321 v1(40.894,28.321)
  Top Layer w0.6: U3.4@11.938,22.581 U3.4 14.224,22.581 14.783,23.139 14.783,26.772 v1(13.691,27.864) ; U1.5 40.615,32.309 42.189,33.884 R4.1 ; R16.2 v1@42.393,5.055 ; R5.1@41.605,22.708 44.933,22.708 45.187,22.962 R3.1 ; D5.1 60.147,13.005 60.833,13.691 FB2.2 ; Q6.1 59.944,7.696 R31.1 59.944,12.802
  Top Layer w1: R3.1 46.796,23.994 C30.2
  Bottom Layer w0.203: v2(15.697,18.567) 16.19,18.074 U6.35 ; J7.2 26.314,3.658 R22.1 v1(25.095,4.699) ; v1(27.864,22.606) 27.864,22.2 28.59,21.474 U6.47 ; U6.8 31.687,15.074 ; R30.1 47.854,5.258 v1(49.124,5.258) ; v1(56.909,13.957) 56.909,15.024 Q10.2
  Bottom Layer w0.254: C13.1 C28.1 ; D3.1 D2.2 ; R30.1 46.634,4.039 43.231,4.039 42.418,4.851 v1(42.418,5.08) v1(42.418,9.906) 42.418,14.656 43.84,16.078 46.482,16.078 R39.1 ; R34.1 48.895,8.636 v1(50.292,8.636) 55.042,8.636 ; Q9.2@56.744,10.033 Q9.2 55.931,9.042 55.448,9.042 55.042,8.636 ; Q3.2@56.744,5.715 Q3.2 55.88,6.756 55.321,6.756 55.042,7.036 55.042,8.636
  Bottom Layer w0.3: U7.7 55.016,27.127 56.032,26.111 v1(56.032,24.663) 56.032,20.777 55.677,20.422 55.677,19.456 R23.1
  Bottom Layer w0.6: 15.875,34.696 16.794,33.777 17.353,33.777 v1(17.526,33.604) ; pad.4 R50.1 ; v2(64.389,25.146) 65.608,26.365 U8.7 ; C32.1 R38.2 65.024,56.642 66.802,58.42 72.771,58.42 74.295,56.896 R40.2 C33.1
  other v1: 69.088,1.778 71.628,1.778 6.985,1.905 60.706,2.286 73.66,2.54 69.088,4.064 71.628,4.064 6.985,4.445 17.145,5.08 65.024,5.334 13.335,5.715 77.47,6.35 69.088,6.604 28.067,6.731 17.145,7.62 19.685,7.62 7.62,8.89 76.2,8.89 69.088,9.398 71.628,9.398 74.422,9.398 17.145,10.16 19.685,10.16 66.04,10.16 1.27,10.795 30.988,11.303 55.88,11.43 76.2,11.43 12.065,12.7 35.433,13.716 73.66,13.97 76.2,13.97 68.58,15.24 35.306,16.002 71.12,16.51 73.66,16.51 76.2,16.51 10.16,17.145 1.27,17.78 66.04,18.415 12.065,19.05 35.306,19.05 71.12,19.05 73.66,19.05 76.2,19.05 78.105,19.05 67.31,19.685 78.105,21.59 78.105,24.765 59.538,24.943 61.697,24.943 47.371,25.654 78.105,27.305 78.105,29.845 73.025,32.385 75.565,32.385 78.105,32.385 44.45,34.29 47.625,34.29 78.105,34.925 28.575,35.56 30.48,37.465 78.105,37.465 16.789,37.795 34.29,39.37 78.105,40.005 78.105,42.545 34.29,43.18 46.99,43.18 48.26,44.45 78.105,45.085 46.355,46.355 34.29,46.99 48.26,47.625 78.105,47.625 78.105,50.165 62.865,50.8 2.54,52.07 78.105,52.705 62.23,53.34 55.88,54.61 65.024,55.245 74.295,55.245 60.325,58.42 64.135,58.42 67.945,58.42 71.755,58.42
  other v2: 38.71,28.397 2.54,33.528 5.08,33.528 7.62,33.528 10.16,33.528 7.62,44.45 7.62,46.99
IIC1_SCL: R6.1 U3.6 U6.42 | length 15.9
  Top Layer w0.203: R6.1@16.129,27.762 16.129,24.638 16.916,23.851 U3.6 23.851,23.851 v1(24.968,22.733)
  Bottom Layer w0.203: v1(24.968,22.733) 26.09,21.611 U6.42
IIC1_SDA: R7.1 U3.5 U6.43 | length 23.1
  Top Layer w0.203: R7.1 14.91,29.261 14.91,27.534 15.697,26.746 15.697,23.851 16.967,22.581 U3.5 23.47,22.581 24.689,21.361 v1(24.689,18.694)
  Bottom Layer w0.203: v1(24.689,18.694) 26.06,18.694 26.59,19.224 U6.43
IN1: pad.8 U6.15 U12.2 | length 16
  Top Layer w0.203: v1(35.585,9.271) 36.982,9.271 pad.8
  Bottom Layer w0.203: U6.15 28.09,10.264 29.083,9.271 v1(35.585,9.271) 36.678,9.271 38.964,11.557 U12.2
IN2: pad.9 U6.14 U13.2 | length 18.8
  Top Layer w0.203: pad.9 v1(32.258,10.033)
  Bottom Layer w0.203: U6.14 28.59,10.526 29.083,10.033 v1(32.258,10.033) 35.433,10.033 36.855,11.455 36.855,16.485 37.668,17.297 U13.2
LED: R19.2 U6.29 | length 4.4
  Top Layer w0.203: R19.2 v1@19.419,15.062
  Bottom Layer w0.203: v1(19.431,15.074) U6.29
LIMIT_SW1: J9.1 R14.1 U6.27 | length 15.7
  Bottom Layer w0.203: R14.1 J9.1 12.167,10.414 13.081,10.414 16.129,13.462 19.685,13.462 20.297,14.074 U6.27
LIMIT_SW2: J10.1 R25.2 U6.28 | length 24
  Bottom Layer w0.203: R25.2 J10.1 4.648,10.922 12.954,10.922 16.002,13.97 19.558,13.97 20.162,14.574 U6.28
M1_1: C32.2 J8.1 Q5.1 Q8.1 R38.1
  other v2: 50.8,42.672 52.324,42.672 53.848,42.672 55.372,42.672 50.8,44.196 52.324,44.196 53.848,44.196 55.372,44.196 50.8,45.72 52.324,45.72 53.848,45.72 55.372,45.72 50.8,47.244 52.324,47.244 53.848,47.244 55.372,47.244 50.8,48.768 52.324,48.768 53.848,48.768 55.372,48.768
M1_2: C33.2 J8.2 Q4.1 Q7.1 R40.1 | length 5
  Bottom Layer w0.6: J8.2 J8.2 R40.1 C33.2
NetC1_1: C1.1 U1.8 | length 3.9
  Top Layer w0.6: C1.1 36.195,32.944 36.805,32.334 U1.8
NetC1_2: C1.2 D1.2 L1.1 U1.1 | length 1
  Top Layer w0.6: L1.1@33.785,24.409 L1.1@33.807,24.432 ; U1.1 U1.1@36.805,26.568
NetC3_1: C3.1 C7.1 F1.2 R1.2 U1.7 | length 25.7
  Top Layer w0.6: v2(35.789,22.911) 35.789,21.869 R1.2 ; U1.7 38.075,33.934 C7.1 39.079,37.581 C3.1 F1.2
  Bottom Layer w0.6: v2(35.789,22.911) 37.465,24.587 37.465,28.946 38.075,29.556 v2(38.075,33.045)
NetC8_2: C8.2 C9.2 C12.1 FB1.1 pad.3 U2.0 U2.2 | length 17.3
  Top Layer w0.6: U2.0 U2.2 21.438,39.929 C12.1@21.996,39.37 ; pad.3 FB1.1 C9.2 21.996,38.354
NetC11_1: C11.1 U1.3 | length 2.8
  Top Layer w0.203: C11.1@39.345,22.758 U1.3
NetC11_2: C11.2 R5.2 | length 2.2
  Top Layer w0.203: C11.2@39.395,20.422 R5.2@41.605,20.422
NetC18_1: C18.1 R8.1 U5.7 | length 8
  Top Layer w0.203: U5.7 3.988,40.894 C18.1 R8.1
NetC18_2: C18.2 R20.1 U5.8 | length 7.6
  Top Layer w0.203: U5.8 C18.2 R20.1
NetC19_1: C19.1 R9.1 U5.9 | length 7.9
  Top Layer w0.203: R9.1 C19.1 2.718,26.365 U5.9
NetC19_2: C19.2 R21.1 U5.10 | length 7.6
  Top Layer w0.203: C19.2@3.988,25.4 U5.10 ; C19.2 R21.1
NetC21_2: C21.2 FB2.1 U9.1 | length 5.9
  Top Layer w0.6: C21.2 56.109,15.316 56.363,15.062 FB2.1 58.572,15.088 U9.1
NetD5_2: D5.2 Q2.1 R13.2 | length 5.4
  Top Layer w0.6: Q2.1 52.602,12.991 54.319,12.991 54.331,12.979 R13.2@54.331,10.49
NetD8_1: D8.1 R24.2 U7.4 U7.5 U8.2 U8.4 | length 32.3
  Top Layer w0.203: D8.1 v1(60.376,17.831)
  Bottom Layer w0.203: U7.4 U7.5 52.476,29.82 53.264,30.607 58.547,30.607 59.258,29.896 U8.2 59.258,26.619 ; v1(60.376,17.831) 59.842,17.297 R24.2 57.048,18.186 57.048,24.409 59.258,26.619 ; U8.4 61.798,26.619 61.443,26.264 59.614,26.264 59.258,26.619
NetD8_2: D8.2 U9.2 | length 2.8
  Top Layer w0.6: U9.2 58.572,18.745 D8.2
NetD10_1: D10.1 R30.2 U11.3 | length 4.5
  Bottom Layer w0.203: U11.3 R30.2 D10.1
NetD10_2: D10.2 R12.1 R29.1 | length 4.5
  Bottom Layer w0.203: R12.1 48.819,2.464 D10.2 R29.1
NetD11_1: D11.1 Q6.2 R31.2 | length 3.9
  Top Layer w0.6: D11.1@55.855,8.407 Q6.2 R31.2
NetD12_1: D12.1 R34.2 R36.1 U8.1 U12.3 | length 30.9
  Top Layer w0.203: v1(49.53,11.303) 49.53,12.7 49.428,12.802 49.428,24.689 50.317,25.578 57.15,25.578 v1(57.988,26.416)
  Bottom Layer w0.203: U12.3 R34.2 D12.1 R36.1 ; v1(57.988,26.416) U8.1
NetD12_2: D12.2 D13.2 R23.2 R24.1 | length 11.6
  Bottom Layer w0.203: D12.2 53.365,13.462 53.924,14.021 55.626,14.021 55.905,14.3 55.905,17.043 R24.1 D13.2 R23.2
NetD13_1: D13.1 R39.2 R43.1 U8.5 U13.3 | length 38.7
  Bottom Layer w0.203: R43.1 D13.1 R39.2 U13.3 45.314,28.296 48.184,31.166 61.697,31.166 63.068,29.794 U8.5
NetF2_1: F2.1 Q2.2 | length 4.8
  Top Layer w0.6: 45.264,10.491 Q2.2@45.264,15.291
NetJ11_2: J11.2 R10.2 | length 2.7
  Top Layer w0.203: R10.2 29.337,47.371 J11.2
NetLED1_1: LED1.1 R19.1 | length 2.2
  Top Layer w0.203: LED1.1@15.418,12.893 R19.1
NetQ1_2: Q1.2 U5.2 | length 12.3
  Top Layer w0.203: U5.2 10.338,38.964 11.151,39.776 14.503,39.776 16.688,41.961 Q1.2
NetQ3_1: Q3.1 R29.2 | length 3.1
  Bottom Layer w0.203: R29.2 Q3.1
NetQ3_3: Q3.3 R26.1 R27.2 | length 4.9
  Bottom Layer w0.203: Q3.3 R27.2 R26.1
NetQ9_1: Q9.1 R36.2 | length 3.2
  Bottom Layer w0.203: R36.2 Q9.1
NetQ9_3: Q9.3 R33.1 R35.2 | length 4.8
  Bottom Layer w0.203: Q9.3 R35.2 R33.1
NetQ10_1: Q10.1 R43.2 | length 3.2
  Bottom Layer w0.203: R43.2 Q10.1
NetQ10_3: Q10.3 R41.1 R42.2 | length 4.9
  Bottom Layer w0.203: Q10.3 R42.2 R41.1
NetR1_1: R1.1 U1.2 | length 3.2
  Top Layer w0.203: R1.1 38.075,23.546 U1.2
NetR2_1: R2.1 R51.2 | length 2
  Top Layer w0.6: R2.1 R51.2
NetR2_2: R2.2 R3.2 U1.4 | length 4.6
  Top Layer w0.6: U1.4 R3.2 R2.2
NetR4_2: R4.2 U1.6 | length 4.3
  Top Layer w0.6: U1.6 39.345,32.944 39.903,33.503 R4.2
NetR11_1: R11.1 U4.2 U4.3 | length 7.4
  Bottom Layer w0.203: U4.3 U4.2 14.249,32.944 14.478,33.172 16.561,33.172 17.221,32.512 R11.1
NetR12_2: R12.2 U7.6 | length 44.1
  Top Layer w0.203: v1(53.746,29.972) v1(53.746,32.106)
  Bottom Layer w0.203: R12.2 43.79,2.464 41.758,4.496 41.758,16.002 44.729,18.974 44.729,28.346 48.489,32.106 v1(53.746,32.106) ; U7.6 v1(53.746,29.972)
NetR17_1: pad.16 R17.1 R18.1 U5.4 | length 10.4
  Top Layer w0.203: U5.4 7.798,39.345 9.169,40.716 11.176,40.716 R17.1 R18.1
NetR26_2: R26.2 U10.2 U10.4 | length 36.7
  Top Layer w0.203: v1@62.662,7.188 62.662,18.542 72.415,28.296 v1(72.415,30.048)
  Bottom Layer w0.203: R26.2 61.265,5.664 62.382,5.664 62.662,5.944 v1(62.662,6.934) ; U10.2 69.875,26.899 70.079,26.695 72.161,26.695 72.415,26.949 U10.4 v1(72.415,30.048)
NetR28_2: R28.2 U11.1 | length 17.4
  Bottom Layer w0.203: U11.1 39.37,4.699 41.123,6.452 41.123,17.145 43.663,19.685 R28.2
NetR32_2: R32.2 U12.1 | length 11.7
  Bottom Layer w0.203: U12.1 39.421,9.728 40.513,10.82 40.513,17.272 41.885,18.644 R32.2
NetR33_2: R33.2 U10.1 | length 21.6
  Top Layer w0.203: v1(61.239,11.227) 62.103,12.09 62.103,19.075 v1(68.605,25.578)
  Bottom Layer w0.203: R33.2 v1(61.239,11.227) ; v1(68.605,25.578) U10.1
NetR37_2: R37.2 U13.1 | length 6
  Bottom Layer w0.203: U13.1 39.472,14.757 40.107,15.392 R37.2
NetR41_2: R41.2 U10.5 | length 21
  Top Layer w0.203: v1(63.322,14.935) 63.322,18.491 71.653,26.822 v1(73.685,26.822)
  Bottom Layer w0.203: R41.2 v1(63.322,14.935) ; v1(73.685,26.822) U10.5
NetR44_1: R44.1 U6.10 U14.1 | length 26
  Top Layer w0.203: v1(26.797,28.931) 26.797,21.692 28.372,20.117 v1(28.372,16.688)
  Bottom Layer w0.203: v1(26.797,28.931) 26.797,32.207 27.254,32.664 U14.1 R44.1 ; v1(28.372,16.688) 28.372,15.164 29.461,14.074 U6.10
NetR44_2: R44.2 R45.1 U14.2 | length 7.8
  Bottom Layer w0.203: U14.2 33.223,31.394 R44.2 R45.1
NetR46_1: R46.1 U14.3 | length 3.2
  Bottom Layer w0.203: U14.3 R46.1
NetR52_2: R52.2 U5.11 | length 3
  Top Layer w0.203: R52.2 U5.11
NetR53_2: R53.2 U5.12 | length 5.4
  Top Layer w0.203: U5.12 6.528,29.388 7.01,28.905 8.865,28.905 R53.2
NRST: C15.2 R15.1 U6.7 | length 4
  Top Layer w0.203: R15.1 29.286,14.834 v1(29.286,15.824) 29.286,16.815 C15.2
  Bottom Layer w0.203: v1(29.286,15.824) 29.536,15.574 U6.7
OSC1: C23.2 U6.5 Y1.2 | length 7.7
  Top Layer w0.203: Y1.2 35.687,17.45 C23.2
  Bottom Layer w0.203: U6.5 31.814,16.574 32.69,17.45 Y1.2
OSC2: C24.2 U6.6 Y1.1 | length 10.1
  Top Layer w0.203: Y1.1 36.017,12.37 C24.2
  Bottom Layer w0.203: U6.6 32.592,16.074 33.858,14.808 Y1.1
REFER: C22.2 C31.1 D7.1 Q6.3 U10.7 | length 44.3
  Top Layer w0.6: D7.1 54.661,3.962 C31.1 C22.2 54.331,6.299 54.534,6.502 Q6.3 58.217,5.944 63.297,5.944 64.237,6.883 64.237,18.415 71.476,25.654 v2(76.225,25.654)
  Bottom Layer w0.6: 76.225,26.06 U10.7
RS485_A: D3.2 J1.1 J2.1 J11.1 pad.15 R50.2 U4.6 | length 75.2
  Top Layer w0.3: J11.1 pad.15 ; J2.1 44.615,58.293 54.483,58.293 58.039,54.737 60.401,54.737 J1.1
  Bottom Layer w0.3: U4.6 12.979,41.478 16.002,44.501 22.479,44.501 D3.2@23.805,45.827 ; D3.2@24.663,46.685 D3.2@23.805,45.827 ; J2.1 40.399,58.75 29.007,58.75 26.797,56.54 J11.1 26.01,48.616 R50.2 22.53,47.102 D3.2@23.805,45.827
RS485_B: D2.1 J1.2 J2.2 pad.14 R10.1 R49.1 U4.7 | length 71.2
  Top Layer w0.3: v1(26.174,43.866) 26.594,44.285 R10.1 ; J2.2 41.567,59.055 55.626,59.055 J1.2
  Bottom Layer w0.3: U4.7 14.249,41.504 16.612,43.866 v1(26.174,43.866) D2.1 ; R49.1@31.027,45.835 D2.1 ; J2.2 38.925,57.518 38.354,58.09 29.667,58.09 28.143,56.566 D2.1
SENSOR: Q7.3 Q8.3 R46.2 R48.2 | length 25.8
  Top Layer w0.203: Q7.3@65.507,34.375 Q7.3
  Top Layer w4: 60.706,39.37 v2(62.431,37.645) v2(63.512,36.564) v2(64.516,35.56) 65.024,35.052
  Bottom Layer w0.203: R46.2 35.814,31.445 35.814,34.747 36.525,35.458 41.681,35.458 42.924,36.701 R48.2
  Bottom Layer w4: 61.721,38.275 62.413,37.624 62.753,37.305 63.029,37.045 63.055,37.02 v2(63.512,36.564) ; v2@63.246,36.83 v2(63.512,36.564) ; v2@63.754,36.322 64.008,36.068 ; v2@64.262,35.814 64.008,36.068 ; v2(63.512,36.564) 64.008,36.068
  other v2: 63.5,34.925 62.23,36.195 64.77,36.83 60.96,37.465 63.5,38.1 61.595,38.735 62.433,39.294
SENSOR_A+: J4.4 R20.2 | length 16.8
  Top Layer w0.203: R20.2 8.433,52.324 14.878,52.324 J4.4
SENSOR_A-: J4.3 R8.2 | length 17.9
  Top Layer w0.203: R8.2 5.004,48.082 8.636,51.714 16.809,51.714 J4.3
SENSOR_B+: R21.2
SENSOR_B-: R9.2
SENSOR_DOUT: pad.0@23.165,21.412 R53.1 U6.18 | length 27.5
  Top Layer w0.203: R53.1 9.906,23.47 11.963,21.412 23.165,21.412 24.058,20.519 24.058,18.411 25.476,16.993 v1(25.476,14.275)
  Bottom Layer w0.203: v1(25.476,14.275) 25.476,13.818 26.59,12.704 U6.18
SENSOR_E+: C16.2 J4.1 Q1.1 R17.2 U5.3 | length 31.9
  Top Layer w0.203: U5.3 9.068,39.141 10.185,40.259 13.005,40.259 R17.2 Q1.1 13.843,46.228 C16.2 12.37,49.225 14.376,51.232 21.406,51.232 J4.1
SENSOR_SCK: pad.1 R52.1 U6.19 | length 30.2
  Top Layer w0.203: R52.1 7.544,25.222 12.243,20.523 22.784,20.523 23.495,19.812 23.495,18.39 24.867,17.018 v1(24.867,13.462)
  Bottom Layer w0.203: v1(24.867,13.462) 25.197,13.462 26.09,12.569 U6.19
SW1: S1.1 U6.46 | length 35.4
  Top Layer w0.203: S1.1@1.651,12.399 S1.1 v1(1.651,13.741)
  Bottom Layer w0.203: v1(1.651,13.741) 1.651,15.669 2.159,16.177 9.812,23.83 25.598,23.83 28.09,21.339 U6.46
SW2: S1.2 U6.45 | length 33.4
  Top Layer w0.203: S1.2@2.921,12.399 S1.2 v1(2.921,13.741)
  Bottom Layer w0.203: v1(2.921,13.741) 2.921,16.202 3.429,16.71 10.07,23.351 25.367,23.351 27.59,21.127 U6.45
SW3: S1.3 U6.41 | length 30.1
  Top Layer w0.203: S1.3@4.191,12.399 v1(4.191,13.741)
  Bottom Layer w0.203: v1(4.191,13.741) 4.191,16.726 10.325,22.86 23.901,22.86 25.59,21.172 U6.41
SW4: S1.4 U6.40 | length 28.2
  Top Layer w0.203: S1.4@5.461,12.399 v1(5.461,13.741)
  Bottom Layer w0.203: v1(5.461,13.741) 5.461,17.289 10.6,22.428 23.749,22.428 25.09,21.087 U6.40
SW5: S1.5 U6.39 | length 26.4
  Top Layer w0.203: S1.5@6.731,12.399 v1(6.731,13.741)
  Bottom Layer w0.203: v1(6.731,13.741) 6.731,17.852 10.875,21.996 23.597,21.996 24.59,21.003 U6.39
SW6: S1.6 U6.38 | length 24.5
  Top Layer w0.203: S1.6@8.001,12.399 v1(8.001,13.741)
  Bottom Layer w0.203: v1(8.001,13.741) 8.001,18.415 11.151,21.565 23.431,21.565 24.09,20.906 U6.38
SW7: S1.7 U6.33 | length 15.5
  Top Layer w0.203: S1.7@9.271,12.399 v1(9.271,13.741)
  Bottom Layer w0.203: v1(9.271,13.741) 10.897,15.367 14.199,15.367 15.906,17.074 U6.33
SW8: S1.8 U6.32 | length 14.1
  Top Layer w0.203: S1.8@10.541,12.399 v1(10.541,13.741)
  Bottom Layer w0.203: v1(10.541,13.741) 11.659,14.859 14.3,14.859 16.015,16.574 U6.32
SWCLK: J5.3 U6.37 | length 29.4
  Top Layer w0.203: J5.3 15.24,5.74 15.24,9.779 13.437,11.582 13.437,18.517 14.783,19.863 v1(22.022,19.863)
  Bottom Layer w0.203: v1(22.022,19.863) 22.606,19.863 22.817,20.074 U6.37
SWDIO: J5.2 U6.34 | length 24.7
  Top Layer w0.203: J5.2@14.173,1.549 J5.2 15.748,3.708 15.748,9.906 14.173,11.481 v1(14.173,16.612)
  Bottom Layer w0.203: v1(14.173,16.612) 15.136,17.574 U6.34
SWITCH_21: pad.11 Q5.2 U10.3 | length 23
  Top Layer w0.203: Q5.2 62.518,41.427 66.827,41.427 68.047,40.208 68.047,33.35 v1(71.145,30.251)
  Bottom Layer w0.203: U10.3 v1(71.145,30.251)
SWITCH_22: pad.12 Q8.2 U8.3 | length 7.2
  Top Layer w0.203: Q8.2 59.815,30.711 v1(60.528,29.997)
  Bottom Layer w0.203: U8.3 v1(60.528,29.997)
SWITCH_23: pad.10 Q4.2 U10.6 | length 27.5
  Top Layer w0.203: pad.10 66.192,48.759 Q4.2 68.504,46.448 68.504,33.909 71.704,30.709 v1(74.955,30.709)
  Bottom Layer w0.203: U10.6 v1(74.955,30.709)
SWITCH_24: pad.13 Q7.2 U8.6 | length 15.1
  Top Layer w0.203: pad.13 64.959,39.663 Q7.2 v1@66.195,38.077
  Bottom Layer w0.203: U8.6 64.338,29.997 67.183,32.842 67.183,37.084 v1(66.192,38.075)
UART1_RX: J6.1 U6.31 | length 24
  Top Layer w0.203: v1(23.419,16.332) 24.232,15.519 24.232,8.407 28.829,3.81 34.29,3.81 J6.1
  Bottom Layer w0.203: U6.31 23.161,16.074 v1(23.419,16.332)
UART1_TX: J6.2 U6.30 | length 20.8
  Top Layer w0.203: v1(23.571,15.164) 23.571,8.433 28.702,3.302 32.258,3.302 J6.2
  Bottom Layer w0.203: U6.30 23.161,15.574 v1(23.571,15.164)
VBG: C17.1 pad.17 U5.6 | length 6.1
  Top Layer w0.203: U5.6 5.258,38.252 7.544,40.538 C17.1
VDD: C21.1 C30.1 D9.2 Q2.3 U7.14 U8.14 U9.3 U11.4 U12.4 U13.4 | length 45.7
  Top Layer w0.6: v2(50.216,13.716) 50.216,16.043 51.764,17.591 ; C30.1@51.764,20.607 51.764,17.591 ; D9.2 57.429,23.393 v1(57.988,23.952) ; U9.3@56.529,17.591 51.764,17.591
  Bottom Layer w0.4: U11.4 44.094,4.699 43.739,5.055 43.739,9.195 44.272,9.728 ; U12.4 44.272,9.728 ; v2(50.216,13.716) 46.787,13.716 45.745,14.757 44.196,14.757 43.764,14.326 43.764,10.236 44.272,9.728
  Bottom Layer w0.6: U7.14 47.396,24.028 48.133,24.765 50.241,24.765 v2(50.952,24.054) ; U8.14 v1(57.988,23.952)
pads on no net: K1.2 K1.4 U3.1 U3.2 U3.3 U3.7 U5.13 U6.2 U6.3 U6.4 U6.25 U6.26 U7.1 U7.2 U7.3 U7.8 U7.9 U7.10 U7.11 U7.12 U7.13 U8.8 U8.9 U8.10 U8.11 U8.12 U8.13 U10.8 U10.9 U10.10 U10.11 U10.12 U10.13 U14.5 U14.6 U14.7

## Polygon pours and split planes (outlines as drawn)
GND on Top Layer "Top Layer-No Net" (solid, remove dead copper, pour order 1000): 0,60 0,0 80,0 80,60
GND on Bottom Layer "Top Layer-No Net" (solid, remove dead copper, pour order 1001): 0,60 0,0 80,0 80,60

## Keep-outs
Keep-Out Layer:
  circle w0.127: c77,57 r1.5
  circle w0.127: c77,3 r1.5
  circle w0.127: c3,3 r1.5
  circle w0.127: c3,57 r1.5
  lines w0.127: 0,0 0,60 80,60 80,0 0,0

## Other copper
Top Layer:
  rectangle net GND: 27.737,31.801 29.286,38.176
  rectangle net GND: 26.645,34.595 35.23,39.091
  rectangle net GND: 33.02,37.465 37.084,47.752
  rectangle net NetC1_2: 33.376,24.333 37.084,26.848
  rectangle net M1_1: 49.682,34.188 56.896,49.657
  rectangle net M1_2: 69.113,34.112 76.276,49.708
  rectangle net GND: 44.425,19.228 48.006,26.264
  rectangle net VDD: 50.521,16.866 52.959,24.486
  rectangle net +24V: 48.26,52.451 52.832,57.658
  rectangle net +24V: 32.436,50.343 52.832,54.864
  rectangle net +24V: 39.116,43.688 43.815,54.102
  pour cut-out: 27.305,28.677 27.305,23.673 27.33,23.647 35.306,23.647 35.306,28.677
  region net NetC1_2: 35.306,23.647 33.325,23.647 33.325,27.559 30.81,30.074 30.81,31.445 34.925,31.445 35.306,31.064
  region net M1_2: 70.764,56.49 70.764,53.137 69.113,51.486 69.113,47.777 76.276,47.777 76.276,51.511 73.254,54.534 73.254,56.49 72.619,57.125 71.577,57.125
  region net +24V: 30.988,58.293 29.464,56.769 29.464,52.832 32.131,50.292 46.101,50.292 46.609,53.467 43.053,54.356 34.671,54.356 33.655,55.372 33.655,57.277 32.639,58.293
Bottom Layer:
  rectangle net GND: 32.893,36.195 37.465,57.658
  rectangle net GND: 52.197,50.165 56.642,59.055
  rectangle net GND: 33.782,50.292 56.642,54.737
  rectangle net SENSOR: 42.164,35.814 62.611,40.005
  region net M1_1: 67.285,56.921 66.472,56.109 66.472,49.784 66.065,49.479 63.957,49.505 49.733,49.505 49.733,42.113 49.708,42.088 49.759,42.037 63.576,42.037 69.367,47.828 69.367,56.134 68.58,56.921

## Silkscreen, mask and mechanical layers (free items; w line width, h text height)
Top Overlay:
  text "+24V" at 48.514,53.569 h1
  text "GND" at 53.213,53.569 h1
  text "485B" at 56.388,53.569 h1
  text "485A" at 60.452,53.569 h1
  text "+24V" at 28.946,53.462 h1
  text "GND" at 33.934,53.365 h1
  text "485B" at 37.465,53.34 h1
  text "485A" at 41.986,53.289 h1
  text "A+" at 15.469,51.13 h1
  text "A-" at 18.161,51.13 h1
  text "E-" at 20.879,51.13 h1
  text "E+" at 23.495,51.13 h1
  text "YarnControl_Driver_v1.3" at 53.061,27.864 h1
  text "2018.12.21" at 60.579,26.289 h1
  text "RX" at 19.05,4.064 h1
  text "TX" at 21.463,4.064 h1
  text "GND" at 23.622,4.064 h1
  text "3.3" at 26.67,4.064 h1
  text "GND" at 29.845,4.064 h1
  text "TX" at 32.893,4.064 h1
  text "RX" at 35.179,4.064 h1
  text "GND" at 7.366,0.127 h1
  text "CLK" at 10.414,0.127 h1
  text "IO" at 13.462,0.127 h1
  text "3.3" at 15.494,0.127 h1
Top Solder:
  lines w3: 59.815,39.638 60.565,39.638 65.14,35.063 66.195,35.063 ; 59.815,50.802 59.815,48.796 64.454,44.157 66.195,44.157

## Dimensions
14.868,65.113 to 64.363,64.313 on Top Overlay
0,0 to 80,0 on Top Overlay
0,0 to 0,60 on Top Overlay

## Text inside footprints (layer, text, board x,y; h text height)
C34: Top Overlay "+" at 42.951,46.025 h1; Bottom Overlay "+" at 44.755,43.612 h1; Bottom Overlay "+" at 41.783,43.942 h1
J9: Top Overlay "1" at 10.519,6.706 h1.1; Top Overlay "2" at 12.879,6.746 h1.1
J10: Top Overlay "1" at 2.492,6.706 h1.1; Top Overlay "2" at 4.852,6.746 h1.1
S1: Top Overlay "8" at 10.16,17.221 h1; Top Overlay "7" at 8.89,17.221 h1; Top Overlay "6" at 7.62,17.221 h1; Top Overlay "5" at 6.35,17.221 h1; Top Overlay "4" at 5.08,17.221 h1; Top Overlay "3" at 3.81,17.221 h1; Top Overlay "2" at 2.54,17.221 h1; Top Overlay "1" at 1.524,17.221 h1